# Altium PCB STM_System_Board.PCBDOC (part 2 of 16)
Units mm, origin at the board's own origin, x right, y up, seen from the top; angles counter-clockwise.
Board outline 222.53 x 100.01 mm, 6 copper layers (Top Layer, Int1 (GND), Int2 (Sign), Layer 1, Layer 2, Bottom Layer), stack 1.526 mm thick; 702 components, 774 nets, 3596 pads, 1988 vias.
Unrouted connection lines stored in the file: 1.
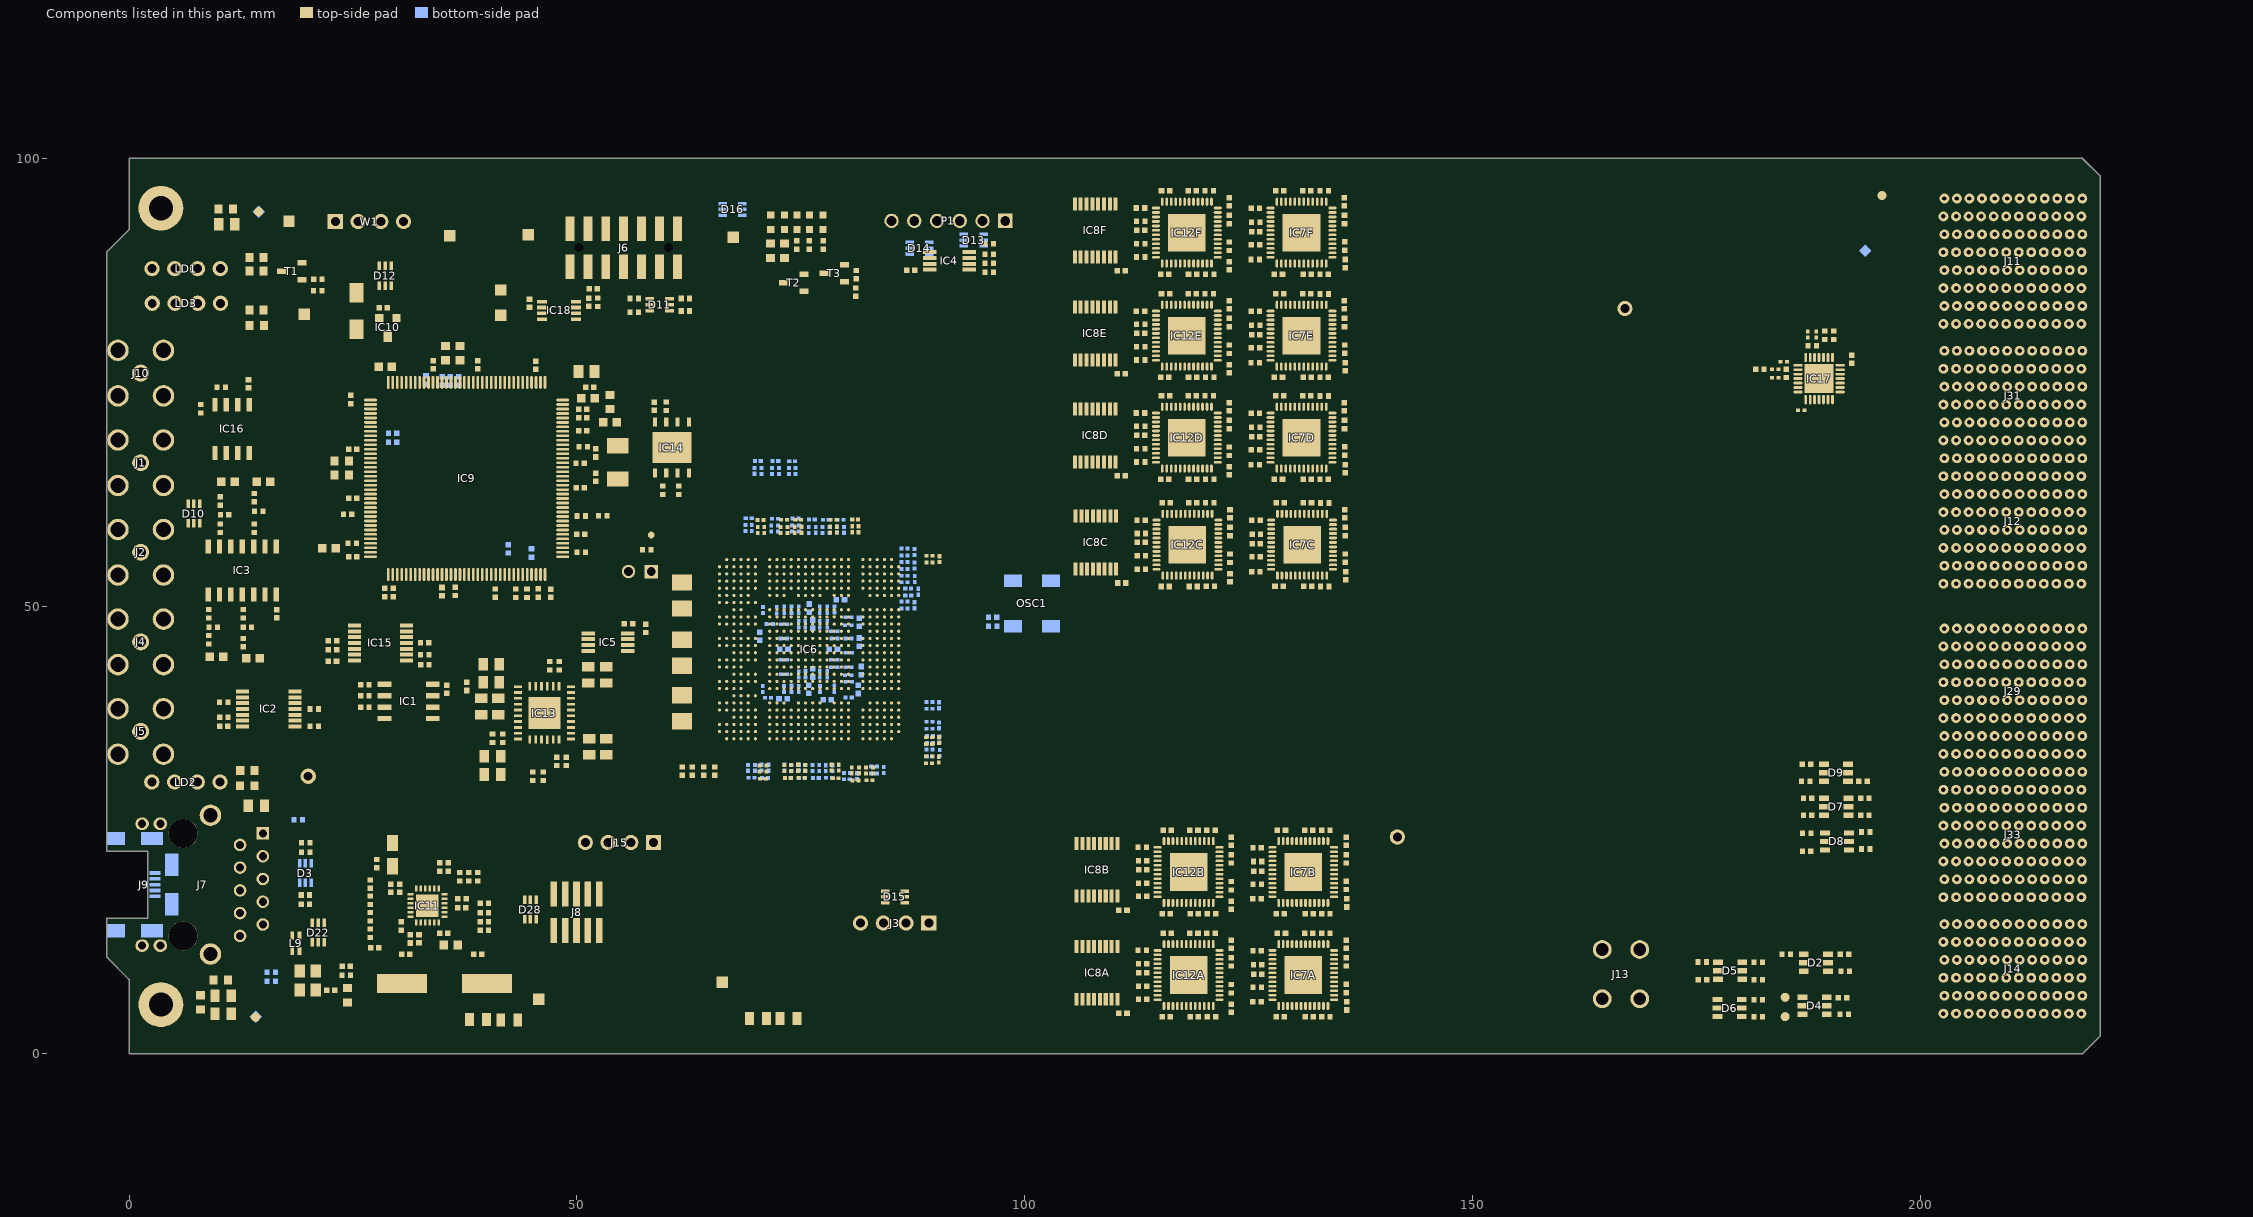
[diagram p6: the components of this part, seen from the top]

## Components (designator, comment, footprint, x,y, rotation, side; value= is the part's Value field where it differs from the comment) (continued)
D1 "SS16" DIOM5127X229N 25.4,82.931 r90 top
D2 "PESD3V3S4UD" SOT95P280X110-6N 188.29,10.191 r0 top
D3 "DRTR5V0U4S-7" SOT65P210X110-6N 19.685,20.195 r90 bottom
D4 "PESD3V3S4UD" SOT95P280X110-6N 188.161,5.368 r0 top
D5 "PESD3V3S4UD" SOT95P280X110-6N 178.734,9.284 r180 top
D6 "PESD3V3S4UD" SOT95P280X110-6N 178.67,5.125 r180 top
D7 "PESD3V3S4UD" SOT95P280X110-6N 190.569,27.58 r180 top
D8 "PESD3V3S4UD" SOT95P280X110-6N 190.648,23.72 r0 top
D9 "PESD3V3S4UD" SOT95P280X110-6N 190.549,31.381 r0 top
D10 "DRTR5V0U4S-7" SOT65P210X110-6N 7.239,60.325 r270 top
D11 "DRTR5V0U4S-7" SOT65P210X110-6N 59.229,83.632 r180 top
D12 "DRTR5V0U4S-7" SOT65P210X110-6N 28.6,86.875 r90 top
D13 "DRTR5V0U4S-7" SOT65P210X110-6N 94.3,90.85 r180 bottom
D14 "DRTR5V0U4S-7" SOT65P210X110-6N 88.225,89.95 r180 bottom
D15 "DRTR5V0U4S-7" SOT65P210X110-6N 85.5,17.525 r0 top
D16 "DRTR5V0U4S-7" SOT65P210X110-6N 67.375,94.275 r180 bottom
D22 "DRTR5V0U4S-7" SOT65P210X110-6N 21.122,13.545 r270 top
D28 "DRTR5V0U4S-7" SOT65P210X110-6N 44.8,16.11 r270 top
FB1 "220R@100MHz" INDC2012X105N 19.939,9.271 r180 top
FB2 "220R@100MHz" INDC2012X105N 19.939,7.112 r180 top
FTG1 "Use only in PCB" FIDUCIAL_TOP_C100-200 14.125,4.1 r90 top
FTG2 "Use only in PCB" FIDUCIAL_TOP_S100-200 14.125,4.175 r90 bottom
FTG3 "Use only in PCB" FIDUCIAL_TOP_S100-200 14.5,94 r90 bottom
FTG4 "Use only in PCB" FIDUCIAL_TOP_S100-200 193.8,89.65 r90 bottom
FTG5 "Use only in PCB" FIDUCIAL_TOP_C100-200 14.475,94.025 r90 top
FTG6 "Use only in PCB" FIDUCIAL_TOP_C100-200 195.675,95.825 r90 top
IC1 "24AA025E48-I/SN" SOIC127P600X175-8N 31.2,39.35 r0 top
IC2 "SN74HCS126PW" SOP65P640X120-14N 15.589,38.506 r180 top
IC3 "SN74HC125D" SOIC127P600X175-14N 12.641,53.966 r270 top
IC4 "LM75AIMM/NOPB" SOP65P490X109-8N 91.567,88.519 r180 top
IC5 "LM75AIMM/NOPB" SOP65P490X109-8N 53.467,45.974 r0 top
IC6 "LFE5U-85F-6BG554C" BGA554C80P26X26_2300X2300X176 75.915,45.184 r270 top locked
IC7A "NB3N401SMNTXG" QFN50P700X700X100-49N-S420 131.075,8.806 r180 top (schematic designator IC7)
IC7B "NB3N401SMNTXG" QFN50P700X700X100-49N-S420 131.075,20.306 r180 top (schematic designator IC7)
IC7C "NB3N401SMNTXG" QFN50P700X700X100-49N-S420 130.944,56.846 r180 top (schematic designator IC7)
IC7D "NB3N401SMNTXG" QFN50P700X700X100-49N-S420 130.879,68.794 r180 top (schematic designator IC7)
IC7E "NB3N401SMNTXG" QFN50P700X700X100-49N-S420 130.879,80.179 r180 top (schematic designator IC7)
IC7F "NB3N401SMNTXG" QFN50P700X700X100-49N-S420 130.879,91.679 r180 top (schematic designator IC7)
IC8A "SN74LV595APWT" SOP65P640X120-16N 108.05,9.056 r270 top (schematic designator IC8)
IC8B "SN74LV595APWT" SOP65P640X120-16N 108.05,20.556 r270 top (schematic designator IC8)
IC8C "SN74LV595APWT" SOP65P640X120-16N 107.919,57.096 r270 top (schematic designator IC8)
IC8D "SN74LV595APWT" SOP65P640X120-16N 107.854,69.044 r270 top (schematic designator IC8)
IC8E "SN74LV595APWT" SOP65P640X120-16N 107.854,80.429 r270 top (schematic designator IC8)
IC8F "SN74LV595APWT" SOP65P640X120-16N 107.854,91.929 r270 top (schematic designator IC8)
IC9 "STM32H743ZIT6" TSQFP50P2200X2200X160-144N 37.685,64.246 r180 top locked
IC10 "STM809SWX6F" SOT-23 29.842,82.143 r180 top
IC11 "LAN8742A-CZ-TR" QFN24_0R5_4X4 33.303,16.561 r90 top
IC12A "NB3N401SMNTXG" QFN50P700X700X100-49N-S420 118.275,8.806 r180 top (schematic designator IC12)
IC12B "NB3N401SMNTXG" QFN50P700X700X100-49N-S420 118.275,20.306 r180 top (schematic designator IC12)
IC12C "NB3N401SMNTXG" QFN50P700X700X100-49N-S420 118.144,56.846 r180 top (schematic designator IC12)
IC12D "NB3N401SMNTXG" QFN50P700X700X100-49N-S420 118.079,68.794 r180 top (schematic designator IC12)
IC12E "NB3N401SMNTXG" QFN50P700X700X100-49N-S420 118.079,80.179 r180 top (schematic designator IC12)
IC12F "NB3N401SMNTXG" QFN50P700X700X100-49N-S420 118.079,91.679 r180 top (schematic designator IC12)
IC13 "MPM54304GMN-0003" MPS_MPM54304GMN 46.372,38.075 r90 top
IC14 "W25Q128JVPIQ" SON127P600X500X80-9N-R345X435 60.602,67.694 r90 top
IC15 "74HC4066PW" SOP65P640X110-14N 28.066,45.876 r180 top
IC16 "LM317LM/NOPB" SOIC127P600X175-8N 11.494,69.765 r270 top
IC17 "CDCLVD1208RHDT" QFN50P500X500X100-29N-S325 188.65,75.389 r270 top
IC18 "PCA9306DCTR" SOP65P400X130-8N 48,83 r0 top
J1 "MCX" AMPHENOL_919-383J-51A 1.3,66 r180 top locked
J2 "MCX" AMPHENOL_919-383J-51A 1.3,56 r180 top locked
J3 "Header 4" SAMTEC_HTSW-104-23-L-S 89.281,14.605 r180 top
J4 "MCX" AMPHENOL_919-383J-51A 1.3,46 r180 top locked
J5 "MCX" AMPHENOL_919-383J-51A 1.3,36 r180 top locked
J6 "Milli-Grid™" MOLEX_87832-1420 55.213,90.007 r180 top
J7 "RJ45" ABRACON_ARJM11C7-114-BA-EW2 6.04,18.895 r270 top locked
J8 "Header 10" SAMTEC_FTSH-105-01-L-DV-K 49.965,15.804 r0 top locked
J9 "Conn_Molex_47491-0001_eec" Molex_47491-0001_0 0.5,18.9 r0 bottom
J10 "MCX" AMPHENOL_919-383J-51A 1.3,76 r180 top locked
J11 "P6" AMPHENOL_10052838-101LF 210.289,88.49 r90 top locked
J12 "P4" AMPHENOL_10052837-101LF 210.289,59.49 r90 top locked
J13 "Mini-Fit Jr.™" MOLEX_39-28-1043 166.54,8.909 r0 top
J14 "P1" AMPHENOL_10052825-101LF 210.289,9.5 r90 top locked
J15 "Header 4" SAMTEC_HTSW-104-23-L-S 58.555,23.6 r180 top
J29 "P3" AMPHENOL_10052837-101LF 210.289,40.49 r90 top locked
J31 "P5" AMPHENOL_10052824-101LF 210.289,73.49 r90 top locked
J33 "P2" AMPHENOL_10052837-101LF 210.289,24.49 r90 top locked
JP2 "1798942 (goldpin 2x 2.54)" jump 58.293,53.848 r270 top
L7 "600R@100MHz" INDC1005X55N 27.66,21.25 r90 top
L9 "90R@100MHz" IND_MURATA_DLW21S 18.63,12.365 r90 top
L15 "600R@100MHz" INDC1005X55N 51.425,74.425 r180 top
LD1 "Red/Green" LED_DIALIGHT_571-0112F 2.565,87.655 r0 top locked
LD2 "Red/Green" LED_DIALIGHT_571-0112F 2.54,30.353 r0 top locked
LD3 "Red/Green" LED_DIALIGHT_571-0112F 2.591,83.795 r0 top locked
LD4 "Green" LED_KINGBRIGHT_KPH-1608CGCK 77.47,92.837 r270 top
LD5 "Green" LED_KINGBRIGHT_KPH-1608CGCK 71.628,92.837 r270 top
LD6 "Green" LED_KINGBRIGHT_KPH-1608CGCK 74.549,92.837 r270 top
LD7 "Green" LED_KINGBRIGHT_KPH-1608CGCK 75.946,92.837 r270 top
LD8 "Green" LED_KINGBRIGHT_KPH-1608CGCK 73.152,92.837 r270 top
OSC1 "100MHz" OSC_ECS_ECS-3953M 100.793,50.302 r180 bottom
P1 "61300611121" 61300611121 91.465,92.992 r180 top
Q1 "8MHz" XTAL_TXC_7A 54.534,66.04 r270 top
Q2 "25MHz" XTAL_ABRACON_ABLS 35.203,7.865 r180 top
R1 "2k2" RESC1005X40N 50.484,60.05 r180 top
R2 "2k2" RESC1005X40N 52.883,60.071 r0 top
R3 "0" RESC1608X55N 10.795,94.336 r180 top
R4 "0" RESC1608X55N 8,5.75 r270 top
R5 "51" RESC1005X40N 61.758,31.574 r90 top
R6 "51" RESC1005X40N 62.862,31.574 r90 top
R7 "51" RESC1005X40N 65.358,31.574 r90 top
R8 "51" RESC1005X40N 10.16,58.674 r270 top
R9 "51" RESC1005X40N 10.16,61.722 r270 top
R10 "10k" RESC1005X40N 10.668,60.198 r0 top
R11 "10k" RESC1005X40N 20.669,36.601 r180 top
R12 "10k" RESC1005X40N 42.351,56.376 r90 bottom
R13 "10k" RESC1005X40N 50.69,67.766 r180 top
R14 "0" RESC1005X40N 21.082,86.487 r180 top
R15 "51" RESC1005X40N 13.97,58.674 r270 top
R16 "10k" RESC1005X40N 24.924,56.996 r0 top
R17 "51" RESC1005X40N 64.158,31.574 r90 top
R18 "10k" RESC1005X40N 20.669,38.506 r180 top
R19 "51" RESC1005X40N 13.97,62.103 r270 top
R20 "10k" RESC1005X40N 14.478,60.579 r0 top
R21 "10k" RESC1005X40N 10.574,39.268 r0 top
R22 "165" RESC0603X28N 81.483,31.66 r270 top
R23 "140" RESC0603X28N 81.103,30.514 r0 top
R24 "165" RESC0603X28N 81.415,58.57 r90 top
R25 "140" RESC0603X28N 81.06,59.662 r0 top
R26 "165" RESC0603X28N 80.67,31.66 r270 top
R27 "165" RESC0603X28N 80.729,58.57 r90 top
R28 "165" RESC0603X28N 89.366,33.986 r0 bottom
R29 "140" RESC0603X28N 90.49,33.587 r90 bottom
R30 "10k" RESC1005X40N 28.551,51.505 r90 top
R31 "10k" RESC1005X40N 40.881,51.442 r90 top
R32 "165" RESC0603X28N 79.812,58.507 r90 bottom
R33 "10k" RESC1005X40N 29.479,51.505 r90 top
R34 "140" RESC0603X28N 79.429,59.623 r0 bottom
R35 "10k" RESC1005X40N 44.424,51.419 r270 top
R36 "49R9" RESC1005X40N 26.909,17.161 r270 top
R37 "49R9" RESC1005X40N 26.909,18.956 r90 top
R38 "165" RESC0603X28N 89.371,33.216 r0 bottom
R39 "330" RESC1005X40N 15.875,9.144 r180 bottom
R40 "49R9" RESC1005X40N 26.909,15.311 r270 top
R41 "49R9" RESC1005X40N 26.909,13.472 r90 top
R42 "10k" RESC1005X40N 39.669,15.781 r180 top
R43 "10k" RESC1005X40N 39.669,14.754 r180 top
R44 "10k" RESC1005X40N 37.909,19.774 r270 top
R45 "33" RESC1005X40N 39.669,16.811 r180 top
R46 "33" RESC1005X40N 39.669,13.814 r180 top
R47 "10k" RESC1005X40N 37.162,17.314 r0 top
R48 "165" RESC0603X28N 79.03,58.518 r90 bottom
R49 "12k1" RESC1005X40N 30.384,14.284 r270 top
R50 "33" RESC1005X40N 38.909,19.774 r270 top
R51 "165" RESC0603X28N 79.21,31.954 r270 top
R52 "140" RESC0603X28N 78.882,30.771 r0 top
R53 "165" RESC0603X28N 78.998,58.518 r90 top
R54 "140" RESC0603X28N 78.625,59.622 r0 top
R55 "10k" RESC1005X40N 15.875,8.128 r180 bottom
R56 "165" RESC0603X28N 78.423,31.954 r270 top
R57 "165" RESC0603X28N 78.262,58.518 r90 top
R58 "220" RESC1608X55N 13.211,31.625 r0 top
R59 "10k" RESC1005X40N 10.586,37.577 r0 top
R60 "33" RESC1005X40N 34.695,20.865 r270 top
R61 "165" RESC0603X28N 80.122,30.653 r0 bottom
R62 "140" RESC0603X28N 81.265,31.009 r270 bottom
R63 "165" RESC0603X28N 73.655,65.059 r90 bottom
R64 "140" RESC0603X28N 74.025,66.152 r180 bottom
R65 "165" RESC0603X28N 80.148,31.364 r0 bottom
R66 "165" RESC0603X28N 74.404,65.058 r90 bottom
R67 "165" RESC0603X28N 76.289,31.932 r270 bottom
R68 "140" RESC0603X28N 76.661,30.803 r180 bottom
R69 "165" RESC0603X28N 75.864,58.5 r90 bottom
R70 "140" RESC0603X28N 76.211,59.647 r180 bottom
R71 "165" RESC0603X28N 77.056,31.932 r270 bottom
R72 "165" RESC0603X28N 76.647,58.505 r90 bottom
R73 "24k" RESC1608X55N 24.384,6.55 r270 top
R74 "165" RESC0603X28N 73.153,31.952 r270 bottom
R75 "10k" RESC1005X40N 24.257,8.763 r0 top
R76 "220" RESC1608X55N 13.192,29.94 r0 top
R77 "220" RESC1608X55N 14.267,81.295 r0 top
R78 "220" RESC1608X55N 14.224,83.058 r0 top
R79 "140" RESC0603X28N 73.55,30.795 r180 bottom
R80 "165" RESC0603X28N 74.777,58.666 r90 bottom
R81 "140" RESC0603X28N 74.396,59.759 r0 bottom
R82 "165" RESC0603X28N 73.94,31.927 r270 bottom
R83 "165" RESC0603X28N 74.015,58.667 r90 bottom
R84 "165" RESC0603X28N 70.596,31.955 r270 bottom
R85 "140" RESC0603X28N 70.978,30.817 r180 bottom
R86 "165" RESC0603X28N 71.679,58.669 r90 bottom
R87 "140" RESC0603X28N 72.11,59.736 r180 bottom
R88 "165" RESC0603X28N 71.389,31.949 r270 bottom
R89 "165" RESC0603X28N 72.441,58.669 r90 bottom
R90 "165" RESC0603X28N 69.861,31.939 r270 bottom
R91 "140" RESC0603X28N 69.497,30.841 r0 bottom
R92 "51" RESC1005X40N 8.89,49.149 r90 top
R93 "51" RESC1005X40N 8.89,46.228 r90 top
R94 "165" RESC0603X28N 69.518,58.696 r90 bottom
R95 "30" RESC1608X55N 53.7,72.775 r270 top
R96 "10k" RESC1005X40N 43.174,51.419 r270 top
R97 "0" RESC1005X40N 45.681,51.449 r270 top
R98 "1k5" RESC1005X40N 36.909,19.774 r270 top
R99 "10k" RESC1005X40N 35.647,20.865 r270 top
R100 "140" RESC0603X28N 69.175,59.802 r0 bottom
R101 "165" RESC0603X28N 69.099,31.939 r270 bottom
R102 "165" RESC0603X28N 68.801,58.696 r90 bottom
R103 "165" RESC0603X28N 74.778,31.952 r270 bottom
R104 "140" RESC0603X28N 75.108,30.795 r180 bottom
R105 "165" RESC0603X28N 69.828,65.089 r90 bottom
R106 "140" RESC0603X28N 70.189,66.192 r180 bottom
R107 "165" RESC0603X28N 75.514,31.927 r270 bottom
R108 "165" RESC0603X28N 70.59,65.086 r90 bottom
R109 "165" RESC0603X28N 74.678,31.947 r270 top
R110 "140" RESC0603X28N 75.066,30.819 r180 top
R111 "165" RESC0603X28N 74.321,58.514 r90 top
R112 "140" RESC0603X28N 74.695,59.638 r180 top
R113 "165" RESC0603X28N 75.443,31.94 r270 top
R114 "165" RESC0603X28N 75.071,58.514 r90 top
R115 "165" RESC0603X28N 73.146,31.929 r270 top
R116 "140" RESC0603X28N 73.531,30.815 r180 top
R117 "165" RESC0603X28N 72.715,58.5 r90 top
R118 "140" RESC0603X28N 73.115,59.621 r180 top
R119 "165" RESC0603X28N 73.897,31.932 r270 top
R120 "165" RESC0603X28N 73.515,58.5 r90 top
R121 "165" RESC0603X28N 71.149,31.862 r270 top
R122 "140" RESC0603X28N 70.743,30.719 r0 top
R123 "165" RESC0603X28N 70.91,58.476 r90 top
R124 "140" RESC0603X28N 70.503,59.594 r0 top
R125 "22" RESC1005X40N 191.49,11.141 r0 top
R126 "22" RESC1005X40N 191.45,4.418 r0 top
R127 "22" RESC1005X40N 191.261,6.268 r0 top
R128 "49R9" RESC1005X40N 50.35,65.925 r180 top
R129 "165" RESC0603X28N 70.387,31.862 r270 top
R130 "165" RESC0603X28N 70.173,58.476 r90 top
R131 "2k2" RESC1005X40N 29.424,69.288 r180 bottom
R132 "2k2" RESC1005X40N 29.424,68.288 r180 bottom
R133 "165" RESC0603X28N 86.569,49.725 r0 bottom
R134 "140" RESC0603X28N 87.687,50.086 r270 bottom
R135 "0" RESC1608X55N 10.25,8.25 r180 top
R136 "10k" RESC1005X40N 44.924,55.919 r270 bottom
R137 "22" RESC1005X40N 191.577,9.241 r0 top
R138 "22" RESC1005X40N 184.988,11.141 r180 top
R139 "22" RESC1005X40N 181.873,6.075 r0 top
R140 "22" RESC1005X40N 175.634,8.284 r180 top
R141 "22" RESC1005X40N 181.873,4.168 r0 top
R142 "22" RESC1005X40N 181.873,10.234 r0 top
R143 "22" RESC1005X40N 181.873,8.284 r0 top
R144 "165" RESC0603X28N 86.571,50.491 r0 bottom
R145 "165" RESC0603X28N 89.357,55.603 r0 top
R146 "140" RESC0603X28N 90.475,55.227 r90 top
R147 "165" RESC0603X28N 89.357,54.866 r0 top
R148 "165" RESC0603X28N 86.974,51.959 r0 bottom
R149 "140" RESC0603X28N 88.102,51.595 r90 bottom
R150 "165" RESC0603X28N 86.978,51.186 r0 bottom
R151 "165" RESC0603X28N 86.569,52.656 r0 bottom
R152 "140" RESC0603X28N 87.705,53.027 r270 bottom
R153 "165" RESC0603X28N 86.573,53.393 r0 bottom
R154 "165" RESC0603X28N 86.559,54.134 r0 bottom
R155 "140" RESC0603X28N 87.67,54.513 r270 bottom
R156 "165" RESC0603X28N 86.558,54.913 r0 bottom
R157 "165" RESC0603X28N 86.559,56.419 r0 bottom
R158 "140" RESC0603X28N 87.667,56.018 r90 bottom
R159 "165" RESC0603X28N 86.562,55.638 r0 bottom
R160 "165" RESC0603X28N 78.189,58.498 r90 bottom
R161 "140" RESC0603X28N 77.776,59.64 r0 bottom
R162 "165" RESC0603X28N 77.419,58.498 r90 bottom
R163 "165" RESC0603X28N 72.542,65.064 r90 bottom
R164 "140" RESC0603X28N 72.145,66.177 r0 bottom
R165 "165" RESC0603X28N 71.767,65.059 r90 bottom
R166A "100" RESC1005X40N 133.599,4.141 r0 top (schematic designator R166)
R166B "100" RESC1005X40N 133.599,15.641 r0 top (schematic designator R166)
R166C "100" RESC1005X40N 133.468,52.181 r0 top (schematic designator R166)
R166D "100" RESC1005X40N 133.403,64.129 r0 top (schematic designator R166)
R166E "100" RESC1005X40N 133.403,75.514 r0 top (schematic designator R166)
R166F "100" RESC1005X40N 133.403,87.014 r0 top (schematic designator R166)
R167A "49R9" RESC1005X40N 125.915,5.806 r0 top (schematic designator R167)
R167B "49R9" RESC1005X40N 125.915,17.306 r0 top (schematic designator R167)
R167C "49R9" RESC1005X40N 125.784,53.846 r0 top (schematic designator R167)
R167D "49R9" RESC1005X40N 125.719,65.794 r0 top (schematic designator R167)
R167E "49R9" RESC1005X40N 125.719,77.179 r0 top (schematic designator R167)
R167F "49R9" RESC1005X40N 125.719,88.679 r0 top (schematic designator R167)
R168A "100" RESC1005X40N 135.877,7.311 r90 top (schematic designator R168)
R168B "100" RESC1005X40N 135.877,18.811 r90 top (schematic designator R168)
R168C "100" RESC1005X40N 135.746,55.351 r90 top (schematic designator R168)
R168D "100" RESC1005X40N 135.681,67.299 r90 top (schematic designator R168)
R168E "100" RESC1005X40N 135.681,78.684 r90 top (schematic designator R168)
R168F "100" RESC1005X40N 135.681,90.184 r90 top (schematic designator R168)
R169A "49R9" RESC1005X40N 125.94,7.455 r0 top (schematic designator R169)
R169B "49R9" RESC1005X40N 125.94,18.955 r0 top (schematic designator R169)
R169C "49R9" RESC1005X40N 125.809,55.495 r0 top (schematic designator R169)
R169D "49R9" RESC1005X40N 125.744,67.443 r0 top (schematic designator R169)
R169E "49R9" RESC1005X40N 125.744,78.828 r0 top (schematic designator R169)
R169F "49R9" RESC1005X40N 125.744,90.328 r0 top (schematic designator R169)
R170A "100" RESC1005X40N 135.872,10.274 r90 top (schematic designator R170)
R170B "100" RESC1005X40N 135.872,21.774 r90 top (schematic designator R170)
R170C "100" RESC1005X40N 135.741,58.314 r90 top (schematic designator R170)
R170D "100" RESC1005X40N 135.676,70.262 r90 top (schematic designator R170)
R170E "100" RESC1005X40N 135.676,81.647 r90 top (schematic designator R170)
R170F "100" RESC1005X40N 135.676,93.147 r90 top (schematic designator R170)
R171A "49R9" RESC1005X40N 125.975,9.981 r0 top (schematic designator R171)
R171B "49R9" RESC1005X40N 125.975,21.481 r0 top (schematic designator R171)
R171C "49R9" RESC1005X40N 125.844,58.021 r0 top (schematic designator R171)
R171D "49R9" RESC1005X40N 125.779,69.969 r0 top (schematic designator R171)
R171E "49R9" RESC1005X40N 125.779,81.354 r0 top (schematic designator R171)
R171F "49R9" RESC1005X40N 125.779,92.854 r0 top (schematic designator R171)
R172A "100" RESC1005X40N 133.601,13.459 r180 top (schematic designator R172)
R172B "100" RESC1005X40N 133.601,24.959 r180 top (schematic designator R172)
R172C "100" RESC1005X40N 133.47,61.499 r180 top (schematic designator R172)
R172D "100" RESC1005X40N 133.405,73.447 r180 top (schematic designator R172)
R172E "100" RESC1005X40N 133.405,84.832 r180 top (schematic designator R172)
R172F "100" RESC1005X40N 133.405,96.332 r180 top (schematic designator R172)
R173A "49R9" RESC1005X40N 125.925,11.531 r0 top (schematic designator R173)
R173B "49R9" RESC1005X40N 125.925,23.031 r0 top (schematic designator R173)
R173C "49R9" RESC1005X40N 125.794,59.571 r0 top (schematic designator R173)
R173D "49R9" RESC1005X40N 125.729,71.519 r0 top (schematic designator R173)
R173E "49R9" RESC1005X40N 125.729,82.904 r0 top (schematic designator R173)
R173F "49R9" RESC1005X40N 125.729,94.404 r0 top (schematic designator R173)
R174A "100" RESC1005X40N 120.835,4.145 r0 top (schematic designator R174)
R174B "100" RESC1005X40N 120.835,15.645 r0 top (schematic designator R174)
R174C "100" RESC1005X40N 120.704,52.185 r0 top (schematic designator R174)
R174D "100" RESC1005X40N 120.639,64.133 r0 top (schematic designator R174)
R174E "100" RESC1005X40N 120.639,75.518 r0 top (schematic designator R174)
R174F "100" RESC1005X40N 120.639,87.018 r0 top (schematic designator R174)
R175A "49R9" RESC1005X40N 113.14,6.09 r0 top (schematic designator R175)
R175B "49R9" RESC1005X40N 113.14,17.59 r0 top (schematic designator R175)
R175C "49R9" RESC1005X40N 113.009,54.129 r0 top (schematic designator R175)
R175D "49R9" RESC1005X40N 112.944,66.078 r0 top (schematic designator R175)
R175E "49R9" RESC1005X40N 112.944,77.463 r0 top (schematic designator R175)
R175F "49R9" RESC1005X40N 112.944,88.963 r0 top (schematic designator R175)
R176 "49R9" RESC1005X40N 24.4,60.25 r0 top
R177 "49R9" RESC1005X40N 33.025,43.425 r0 top
R178A "100" RESC1005X40N 123.028,7.286 r90 top (schematic designator R178)
R178B "100" RESC1005X40N 123.028,18.786 r90 top (schematic designator R178)
R178C "100" RESC1005X40N 122.897,55.326 r90 top (schematic designator R178)
R178D "100" RESC1005X40N 122.832,67.274 r90 top (schematic designator R178)
R178E "100" RESC1005X40N 122.832,78.659 r90 top (schematic designator R178)
R178F "100" RESC1005X40N 122.832,90.159 r90 top (schematic designator R178)
R179 "49R9" RESC1005X40N 22.709,46.13 r180 top
R180 "1k" RESC1608X55N 36.935,78.232 r90 top
R181 "1k" RESC1608X55N 35.306,78.232 r90 top
R182 "1k" RESC1608X55N 23.749,66.167 r180 top
R183 "1k" RESC1608X55N 23.749,64.643 r180 top
R184A "49R9" RESC1005X40N 113.14,7.556 r0 top (schematic designator R184)
R184B "49R9" RESC1005X40N 113.14,19.056 r0 top (schematic designator R184)
R184C "49R9" RESC1005X40N 113.009,55.596 r0 top (schematic designator R184)
R184D "49R9" RESC1005X40N 112.944,67.544 r0 top (schematic designator R184)
R184E "49R9" RESC1005X40N 112.944,78.929 r0 top (schematic designator R184)
R184F "49R9" RESC1005X40N 112.944,90.429 r0 top (schematic designator R184)
R185 "49R9" RESC1005X40N 36.435,51.629 r90 top
R186 "49R9" RESC1005X40N 36.825,75.125 r90 bottom
R187 "49R9" RESC1005X40N 35.875,75.125 r90 bottom
R188 "49R9" RESC1005X40N 34.95,75.125 r90 bottom
R189 "49R9" RESC1005X40N 33.15,75.225 r90 bottom
R190A "100" RESC1005X40N 123.028,10.274 r90 top (schematic designator R190)
R190B "100" RESC1005X40N 123.028,21.774 r90 top (schematic designator R190)
R190C "100" RESC1005X40N 122.897,58.314 r90 top (schematic designator R190)
R190D "100" RESC1005X40N 122.832,70.262 r90 top (schematic designator R190)
R190E "100" RESC1005X40N 122.832,81.647 r90 top (schematic designator R190)
R190F "100" RESC1005X40N 122.832,93.147 r90 top (schematic designator R190)
R191A "49R9" RESC1005X40N 113.14,10.056 r0 top (schematic designator R191)
R191B "49R9" RESC1005X40N 113.14,21.556 r0 top (schematic designator R191)
R191C "49R9" RESC1005X40N 113.009,58.096 r0 top (schematic designator R191)
R191D "49R9" RESC1005X40N 112.944,70.044 r0 top (schematic designator R191)
R191E "49R9" RESC1005X40N 112.944,81.429 r0 top (schematic designator R191)
R191F "49R9" RESC1005X40N 112.944,92.929 r0 top (schematic designator R191)
R192A "100" RESC1005X40N 120.778,13.481 r180 top (schematic designator R192)
R192B "100" RESC1005X40N 120.778,24.981 r180 top (schematic designator R192)
R192C "100" RESC1005X40N 120.647,61.521 r180 top (schematic designator R192)
R192D "100" RESC1005X40N 120.582,73.469 r180 top (schematic designator R192)
R192E "100" RESC1005X40N 120.582,84.854 r180 top (schematic designator R192)
R192F "100" RESC1005X40N 120.582,96.354 r180 top (schematic designator R192)
R193A "49R9" RESC1005X40N 113.1,11.556 r0 top (schematic designator R193)
R193B "49R9" RESC1005X40N 113.1,23.056 r0 top (schematic designator R193)
R193C "49R9" RESC1005X40N 112.969,59.596 r0 top (schematic designator R193)
R193D "49R9" RESC1005X40N 112.904,71.544 r0 top (schematic designator R193)
R193E "49R9" RESC1005X40N 112.904,82.929 r0 top (schematic designator R193)
R193F "49R9" RESC1005X40N 112.904,94.429 r0 top (schematic designator R193)
R194 "10k" RESC1005X40N 21.067,85.21 r0 top
R195 "10k" RESC1005X40N 77.47,90.297 r270 top
R196 "1k" RESC1608X55N 71.628,89.662 r90 top
R197 "49R9" RESC1005X40N 32.996,45.876 r0 top
R198 "10k" RESC1005X40N 50.482,56.002 r180 top
R199 "10" RESC1005X40N 19.717,22.531 r180 top
R200 "10k" RESC1005X40N 9.398,47.625 r0 top
R201 "51" RESC1005X40N 12.754,49.149 r90 top
R202 "51" RESC1005X40N 12.754,45.914 r90 top
R203 "10k" RESC1005X40N 13.208,47.625 r0 top
R204 "22" RESC1005X40N 175.616,10.262 r180 top
R205 "22" RESC1005X40N 96.415,47.747 r180 bottom
R206 "1k2" RESC1608X55N 14.224,88.9 r180 top
R207 "10k" RESC1005X40N 74.549,90.297 r270 top
R208 "10k" RESC1005X40N 75.946,90.297 r270 top
R209 "1k2" RESC1608X55N 14.224,87.376 r0 top
R210 "0" RESC1005X40N 45.085,30.988 r270 top
R211 "0" RESC1005X40N 46.228,30.988 r270 top
R212 "330" RESC1005X40N 18.894,26.162 r180 bottom
R213 "10k" RESC1005X40N 81.131,85.04 r270 top
R214 "10k" RESC1005X40N 81.153,86.995 r270 top
R215 "10k" RESC1005X40N 96.012,87.249 r0 top
R216 "10k" RESC1005X40N 96.012,88.265 r0 top
R217 "10k" RESC1005X40N 96.012,90.424 r0 top
R218 "0" RESC1005X40N 96.012,89.281 r0 top
R219 "0" RESC1005X40N 57.658,47.498 r270 top
R220 "10" RESC1005X40N 19.717,23.556 r180 top
R221 "10" RESC1005X40N 19.685,16.691 r180 top
R222 "10" RESC1005X40N 19.685,17.744 r180 top
R223 "4k7" RESC1005X40N 59.586,62.924 r270 top
R224 "4k7" RESC1005X40N 59.967,72.292 r90 top
R225 "4k7" RESC1005X40N 61.364,62.924 r270 top
R226 "1k" RESC1005X40N 33.019,44.554 r0 top
R227 "4k7" RESC1005X40N 56.388,82.804 r180 top
R228 "10k" RESC1005X40N 22.709,45.114 r180 top
R229 "4k7" RESC1005X40N 57.785,56.276 r180 top
R230 "1k5" RESC1005X40N 41.716,35.23 r270 top
R231 "1k8" RESC1005X40N 40.573,35.23 r270 top
R232 "5k1" RESC1005X40N 48.012,43.334 r90 top
R233 "1k6" RESC1005X40N 46.946,43.328 r90 top
R234 "6k8" RESC1005X40N 48.808,32.657 r270 top
R235 "1k5" RESC1005X40N 47.732,32.657 r270 top
R236 "1k" RESC1608X55N 73.152,89.662 r90 top
R237 "470" RESC1005X40N 10.287,74.422 r0 top
R238 "820" RESC1005X40N 7.994,72.015 r90 top
R239 "4k7" RESC1005X40N 62.103,82.931 r180 top
R240 "4k7" RESC1005X40N 62.103,84.328 r180 top
R241 "4k7" RESC1005X40N 56.388,84.328 r180 top
R242 "330" RESC1005X40N 182.05,76.439 r180 top
R243 "1k5" RESC1005X40N 189.3,80.214 r270 top
R244 "4k7" RESC1005X40N 190.275,80.214 r270 top
R245 "49R9" RESC1005X40N 187.882,79.052 r0 top
R246 "1k5" RESC1005X40N 185,75.964 r90 top
R247 "165" RESC0603X28N 89.348,39.301 r0 bottom
R248 "140" RESC0603X28N 90.425,38.925 r90 bottom
R249 "165" RESC0603X28N 89.348,38.529 r0 bottom
R250 "165" RESC0603X28N 89.323,34.593 r0 top
R251 "140" RESC0603X28N 90.4,35.025 r270 top
R252 "165" RESC0603X28N 89.323,35.365 r0 top
R253 "165" RESC0603X28N 89.298,33.233 r0 top
R254 "140" RESC0603X28N 90.375,32.843 r90 top
R255 "165" RESC0603X28N 89.298,32.461 r0 top
R256 "165" RESC0603X28N 89.348,37.07 r0 bottom
R257 "140" RESC0603X28N 90.425,36.686 r90 bottom
R258 "165" RESC0603X28N 89.348,36.299 r0 bottom
R259 "165" RESC0603X28N 82.273,31.627 r270 top
R260 "140" RESC0603X28N 82.661,30.55 r180 top
R261 "165" RESC0603X28N 83.045,31.627 r270 top
R262 "22" RESC1005X40N 187.274,24.638 r180 top
R263 "22" RESC1005X40N 187.26,22.619 r180 top
R264 "22" RESC1005X40N 187.249,32.331 r180 top
R265 "22" RESC1005X40N 187.153,30.431 r180 top
R266 "22" RESC1005X40N 193.855,22.876 r0 top
R267 "22" RESC1005X40N 193.855,24.776 r0 top
R268 "22" RESC1005X40N 193.769,26.63 r0 top
R269 "22" RESC1005X40N 193.769,28.53 r0 top
R270 "22" RESC1005X40N 187.369,28.53 r180 top
R271 "22" RESC1005X40N 193.549,30.431 r0 top
R272 "22" RESC1005X40N 187.369,26.63 r180 top
R273 "165" RESC0603X28N 89.398,34.712 r0 bottom
R274 "140" RESC0603X28N 90.475,35.093 r270 bottom
R275 "165" RESC0603X28N 89.398,35.484 r0 bottom
R276 "165" RESC0603X28N 83.175,32.09 r0 bottom
R277 "140" RESC0603X28N 84.25,31.696 r90 bottom
R278 "165" RESC0603X28N 83.173,31.318 r0 bottom
R279 "165" RESC0603X28N 78.547,31.9 r270 bottom
R280 "140" RESC0603X28N 78.15,30.825 r0 bottom
R281 "165" RESC0603X28N 77.775,31.9 r270 bottom
R282 "200k" RESC1005X40N 52.3,83.9 r90 top
R283 "0" RESC1005X40N 96.4,48.725 r0 bottom
R284 "0" RESC1005X40N 26.325,38.7 r0 top
R285 "0" RESC1005X40N 26.325,39.962 r0 top
R286 "0" RESC1005X40N 26.325,41.225 r0 top
R287 "4M7" RESC2113X55N 70.208,3.959 r0 top
R288 "4M7" RESC2113X55N 73.6,3.95 r0 top
R289 "4M7" RESC2113X55N 42.442,3.817 r180 top
R290 "4M7" RESC2113X55N 38.975,3.825 r180 top
R300 "4k7" RESC1005X40N 24.765,73.05 r90 top
ST2 "SCHROFF_PANEL_3HP_4U - STM_sys_Board" "SCHROFF_PANEL_3HP_4U - STM_sys_Board" 3.556,5.512 r0 top locked
T1 "BSH103" SOT95P230X110-3N 18.161,87.376 r180 top
T2 "BSH103" SOT95P230X110-3N 74.175,86.106 r180 top
T3 "BSH103" SOT95P230X110-3N 78.73,87.158 r180 top
TP1 "Test Point" TPS127 41.475,85.275 r0 top
TP2 "Test Point" TPS127 41.48,82.477 r0 top
TP3 "Test Point" TPS127 45.72,6.096 r0 top
TP4 "Test Point" TPS127 66.215,7.997 r90 top
TP5 "Test Point" TPS127 17.856,92.939 r0 top
TP6 "Test Point" TPS127 67.437,91.186 r180 top
TP7 "Test Point" TPS127 44.577,91.44 r0 top
TP8 "Test Point" TPS127 19.558,82.55 r0 top
TP9 "Test Point" TPS127 35.814,91.313 r0 top
W1 "Header 4" SAMTEC_HTSW-104-23-L-S 23.028,92.917 r0 top

## Footprints (in the part's own frame and the unit in brackets; to place one, negate y for a bottom-side part, rotate by r counter-clockwise, add the part's x,y. Pads: shape width x height; smd on the part's side, far side on the other; paste and mask are expansions set on the pad)
61300611121 [mm] "Pin Header, pitch 2.54 mm, THT, Vertical, single row, 6p"
  rect 1.6x1.6 hole 1.1: 1(-6.35,0)
  round 1.6 hole 1.1: 2(-3.81,0) 3(-1.27,0) 4(1.27,0) 5(3.81,0) 6(6.35,0)
  silkscreen extent -7.77,-1.35 7.77,1.35, body extent -7.62,-1.27 7.62,1.27, height 8.57
ABRACON_ARJM11C7-114-BA-EW2 [mm] "LAN Transformer, body 21.84x15.88mm"
  round 1.4 hole 0.9: 1(5.715,6.35) 2(4.445,8.89) 3(3.175,6.35) 4(1.905,8.89) 5(0.635,6.35) 6(-0.635,8.89) 7(-1.905,6.35) 8(-3.175,8.89) 9(-4.445,6.35)
  rect 1.4x1.4 hole 0.9: 10(-5.715,8.89)
  oval 1.4x1.52 hole 0.9: L1(-6.8,-2.55) L2(-6.8,-4.58) L3(6.8,-2.55) L4(6.8,-4.58)
  round 3.25 hole 3.25 unplated: MH1(-5.715,0) MH2(5.715,0)
  round 2.4 hole 1.6: S1(-7.745,3.05) S2(7.745,3.05)
  silkscreen extent -8,-10.87 8.04,10.63, body extent -10.33,-10.87 10.33,10.63, height 16.15
AMPHENOL_919-383J-51A [mm] "50 Ohm, RF Connector, MCX Right Angle PCB Receptacle Jack"
  round 1.9 hole 1.2: 1(0,0)
  round 2.4 hole 1.7: 2(-2.54,2.54) 2(-2.54,-2.54) 2(2.54,2.54) 2(2.54,-2.54)
  silkscreen extent -3,-3 6.5,3, body extent -3,-3 6.5,3, height 6
AMPHENOL_10052824-101LF [mm] "72 Contacts, 2mm Pitch, 6 Columns, 4 Pairs per Column, 2 Walls, Right Angle Header"
  round 1.1 hole 0.5: A1(-5,-7.65) A2(-3,-7.75) A3(-1,-7.65) A4(1,-7.75) A5(3,-7.65) A6(5,-7.75) B1(-5,-6.25) B2(-3,-6.35) B3(-1,-6.25) B4(1,-6.35) B5(3,-6.25) B6(5,-6.35) C1(-5,-4.85) C2(-3,-4.95) C3(-1,-4.85) C4(1,-4.95) C5(3,-4.85) C6(5,-4.95) D1(-5,-3.45) D2(-3,-3.55) D3(-1,-3.45) D4(1,-3.55) D5(3,-3.45) D6(5,-3.55) E1(-5,-2.05) E2(-3,-2.15) E3(-1,-2.05) E4(1,-2.15) E5(3,-2.05) E6(5,-2.15) F1(-5,-0.65) F2(-3,-0.75) F3(-1,-0.65) F4(1,-0.75) F5(3,-0.65) F6(5,-0.75) G1(-5,0.75) G2(-3,0.65) G3(-1,0.75) G4(1,0.65) G5(3,0.75) G6(5,0.65) H1(-5,2.15) H2(-3,2.05) H3(-1,2.15) H4(1,2.05) H5(3,2.15) H6(5,2.05) I1(-5,3.55) I2(-3,3.45) I3(-1,3.55) I4(1,3.45) I5(3,3.55) I6(5,3.45) J1(-5,4.95) J2(-3,4.85) J3(-1,4.95) J4(1,4.85) J5(3,4.95) J6(5,4.85) K1(-5,6.35) K2(-3,6.25) K3(-1,6.35) K4(1,6.25) K5(3,6.35) K6(5,6.25) L1(-5,7.75) L2(-3,7.65) L3(-1,7.75) L4(1,7.65) L5(3,7.75) L6(5,7.65)
  silkscreen extent -5.95,-21.95 5.95,11.85, body extent -5.95,-21.95 5.95,11.85, height 15.25
AMPHENOL_10052825-101LF [mm] "72 Contacts, 2mm Pitch, 6 Columns, 4 Pairs per Column, 4 Walls, Right Angle Header"
  round 1.1 hole 0.5: A1(-5,-7.65) A2(-3,-7.75) A3(-1,-7.65) A4(1,-7.75) A5(3,-7.65) A6(5,-7.75) B1(-5,-6.25) B2(-3,-6.35) B3(-1,-6.25) B4(1,-6.35) B5(3,-6.25) B6(5,-6.35) C1(-5,-4.85) C2(-3,-4.95) C3(-1,-4.85) C4(1,-4.95) C5(3,-4.85) C6(5,-4.95) D1(-5,-3.45) D2(-3,-3.55) D3(-1,-3.45) D4(1,-3.55) D5(3,-3.45) D6(5,-3.55) E1(-5,-2.05) E2(-3,-2.15) E3(-1,-2.05) E4(1,-2.15) E5(3,-2.05) E6(5,-2.15) F1(-5,-0.65) F2(-3,-0.75) F3(-1,-0.65) F4(1,-0.75) F5(3,-0.65) F6(5,-0.75) G1(-5,0.75) G2(-3,0.65) G3(-1,0.75) G4(1,0.65) G5(3,0.75) G6(5,0.65) H1(-5,2.15) H2(-3,2.05) H3(-1,2.15) H4(1,2.05) H5(3,2.15) H6(5,2.05) I1(-5,3.55) I2(-3,3.45) I3(-1,3.55) I4(1,3.45) I5(3,3.55) I6(5,3.45) J1(-5,4.95) J2(-3,4.85) J3(-1,4.95) J4(1,4.85) J5(3,4.95) J6(5,4.85) K1(-5,6.35) K2(-3,6.25) K3(-1,6.35) K4(1,6.25) K5(3,6.35) K6(5,6.25) L1(-5,7.75) L2(-3,7.65) L3(-1,7.75) L4(1,7.65) L5(3,7.75) L6(5,7.65)
  silkscreen extent -6.95,-21.95 6.95,11.85, body extent -6.95,-21.95 6.95,11.85, height 15.25
AMPHENOL_10052837-101LF [mm] "96 Contacts, 2mm Pitch, 8 Columns, 4 Pairs per Column, 2 Walls, Right Angle Header"
  round 1.1 hole 0.5: A1(-7,-7.65) A2(-5,-7.75) A3(-3,-7.65) A4(-1,-7.75) A5(1,-7.65) A6(3,-7.75) A7(5,-7.65) A8(7,-7.75) B1(-7,-6.25) B2(-5,-6.35) B3(-3,-6.25) B4(-1,-6.35) B5(1,-6.25) B6(3,-6.35) B7(5,-6.25) B8(7,-6.35) C1(-7,-4.85) C2(-5,-4.95) C3(-3,-4.85) C4(-1,-4.95) C5(1,-4.85) C6(3,-4.95) C7(5,-4.85) C8(7,-4.95) D1(-7,-3.45) D2(-5,-3.55) D3(-3,-3.45) D4(-1,-3.55) D5(1,-3.45) D6(3,-3.55) D7(5,-3.45) D8(7,-3.55) E1(-7,-2.05) E2(-5,-2.15) E3(-3,-2.05) E4(-1,-2.15) E5(1,-2.05) E6(3,-2.15) E7(5,-2.05) E8(7,-2.15) F1(-7,-0.65) F2(-5,-0.75) F3(-3,-0.65) F4(-1,-0.75) F5(1,-0.65) F6(3,-0.75) F7(5,-0.65) F8(7,-0.75) G1(-7,0.75) G2(-5,0.65) G3(-3,0.75) G4(-1,0.65) G5(1,0.75) G6(3,0.65) G7(5,0.75) G8(7,0.65) H1(-7,2.15) H2(-5,2.05) H3(-3,2.15) H4(-1,2.05) H5(1,2.15) H6(3,2.05) H7(5,2.15) H8(7,2.05) I1(-7,3.55) I2(-5,3.45) I3(-3,3.55) I4(-1,3.45) I5(1,3.55) I6(3,3.45) I7(5,3.55) I8(7,3.45) J1(-7,4.95) J2(-5,4.85) J3(-3,4.95) J4(-1,4.85) J5(1,4.95) J6(3,4.85) J7(5,4.95) J8(7,4.85) K1(-7,6.35) K2(-5,6.25) K3(-3,6.35) K4(-1,6.25) K5(1,6.35) K6(3,6.25) K7(5,6.35) K8(7,6.25) L1(-7,7.75) L2(-5,7.65) L3(-3,7.75) L4(-1,7.65) L5(1,7.75) L6(3,7.65) L7(5,7.75) L8(7,7.65)
  silkscreen extent -7.95,-21.95 7.95,11.85, body extent -7.95,-21.95 7.95,11.85, height 15.25
AMPHENOL_10052838-101LF [mm] "96 Contacts, 2mm Pitch, 8 Columns, 4 Pairs per Column, 4 Walls, Right Angle Header"
  round 1.1 hole 0.5: A1(-7,-7.65) A2(-5,-7.75) A3(-3,-7.65) A4(-1,-7.75) A5(1,-7.65) A6(3,-7.75) A7(5,-7.65) A8(7,-7.75) B1(-7,-6.25) B2(-5,-6.35) B3(-3,-6.25) B4(-1,-6.35) B5(1,-6.25) B6(3,-6.35) B7(5,-6.25) B8(7,-6.35) C1(-7,-4.85) C2(-5,-4.95) C3(-3,-4.85) C4(-1,-4.95) C5(1,-4.85) C6(3,-4.95) C7(5,-4.85) C8(7,-4.95) D1(-7,-3.45) D2(-5,-3.55) D3(-3,-3.45) D4(-1,-3.55) D5(1,-3.45) D6(3,-3.55) D7(5,-3.45) D8(7,-3.55) E1(-7,-2.05) E2(-5,-2.15) E3(-3,-2.05) E4(-1,-2.15) E5(1,-2.05) E6(3,-2.15) E7(5,-2.05) E8(7,-2.15) F1(-7,-0.65) F2(-5,-0.75) F3(-3,-0.65) F4(-1,-0.75) F5(1,-0.65) F6(3,-0.75) F7(5,-0.65) F8(7,-0.75) G1(-7,0.75) G2(-5,0.65) G3(-3,0.75) G4(-1,0.65) G5(1,0.75) G6(3,0.65) G7(5,0.75) G8(7,0.65) H1(-7,2.15) H2(-5,2.05) H3(-3,2.15) H4(-1,2.05) H5(1,2.15) H6(3,2.05) H7(5,2.15) H8(7,2.05) I1(-7,3.55) I2(-5,3.45) I3(-3,3.55) I4(-1,3.45) I5(1,3.55) I6(3,3.45) I7(5,3.55) I8(7,3.45) J1(-7,4.95) J2(-5,4.85) J3(-3,4.95) J4(-1,4.85) J5(1,4.95) J6(3,4.85) J7(5,4.95) J8(7,4.85) K1(-7,6.35) K2(-5,6.25) K3(-3,6.35) K4(-1,6.25) K5(1,6.35) K6(3,6.25) K7(5,6.35) K8(7,6.25) L1(-7,7.75) L2(-5,7.65) L3(-3,7.75) L4(-1,7.65) L5(1,7.75) L6(3,7.65) L7(5,7.75) L8(7,7.65)
  silkscreen extent -8.95,-21.95 8.95,11.85, body extent -8.95,-21.95 8.95,11.85, height 15.25
BGA554C80P26X26_2300X2300X176 [mm] "BGA, 0.80mm Pitch, Square; 554Pin, 26 Columns X 26 Rows, 23mm X 23mm X 1.76mm H"
  round 0.35 smd: A2(-9.2,10) A3(-8.4,10) A4(-7.6,10) A5(-6.8,10) A6(-6,10) A8(-4.4,10) A9(-3.6,10) A10(-2.8,10) A11(-2,10) A12(-1.2,10) A13(-0.4,10) A14(0.4,10) A15(1.2,10) A16(2,10) A17(2.8,10) A18(3.6,10) A19(4.4,10) A21(6,10) A22(6.8,10) A23(7.6,10) A24(8.4,10) A25(9.2,10) AA1(-10,-6) AA2(-9.2,-6) AA3(-8.4,-6) AA4(-7.6,-6) AA5(-6.8,-6) AA7(-5.2,-6) AA9(-3.6,-6) AA10(-2.8,-6) AA12(-1.2,-6) AA13(-0.4,-6) AA14(0.4,-6) AA15(1.2,-6) AA17(2.8,-6) AA18(3.6,-6) AA20(5.2,-6) AA22(6.8,-6) AA23(7.6,-6) AA24(8.4,-6) AA25(9.2,-6) AA26(10,-6) AB1(-10,-6.8) AB2(-9.2,-6.8) AB3(-8.4,-6.8) AB4(-7.6,-6.8) AB5(-6.8,-6.8) AB6(-6,-6.8) AB7(-5.2,-6.8) AB9(-3.6,-6.8) AB10(-2.8,-6.8) AB12(-1.2,-6.8) AB13(-0.4,-6.8) AB14(0.4,-6.8) AB15(1.2,-6.8) AB17(2.8,-6.8) AB18(3.6,-6.8) AB20(5.2,-6.8) AB21(6,-6.8) AB22(6.8,-6.8) AB23(7.6,-6.8) AB24(8.4,-6.8) AB25(9.2,-6.8) AB26(10,-6.8) AC1(-10,-7.6) AC2(-9.2,-7.6) AC3(-8.4,-7.6) AC4(-7.6,-7.6) AC5(-6.8,-7.6) AC6(-6,-7.6) AC7(-5.2,-7.6) AC8(-4.4,-7.6) AC9(-3.6,-7.6) AC10(-2.8,-7.6) AC11(-2,-7.6) AC12(-1.2,-7.6) AC13(-0.4,-7.6) AC14(0.4,-7.6) AC15(1.2,-7.6) AC16(2,-7.6) AC17(2.8,-7.6) AC18(3.6,-7.6) AC19(4.4,-7.6) AC20(5.2,-7.6) AC21(6,-7.6) AC22(6.8,-7.6) AC23(7.6,-7.6) AC24(8.4,-7.6) AC25(9.2,-7.6) AC26(10,-7.6) AD1(-10,-8.4) AD2(-9.2,-8.4) AD3(-8.4,-8.4) AD4(-7.6,-8.4) AD5(-6.8,-8.4) AD6(-6,-8.4) AD7(-5.2,-8.4) AD8(-4.4,-8.4) AD9(-3.6,-8.4) AD10(-2.8,-8.4) AD11(-2,-8.4) AD12(-1.2,-8.4) AD13(-0.4,-8.4) AD14(0.4,-8.4) AD15(1.2,-8.4) AD16(2,-8.4) AD17(2.8,-8.4) AD18(3.6,-8.4) AD19(4.4,-8.4) AD20(5.2,-8.4) AD21(6,-8.4) AD22(6.8,-8.4) AD23(7.6,-8.4) AD24(8.4,-8.4) AD25(9.2,-8.4) AD26(10,-8.4) AE1(-10,-9.2) AE2(-9.2,-9.2) AE3(-8.4,-9.2) AE4(-7.6,-9.2) AE5(-6.8,-9.2) AE6(-6,-9.2) AE7(-5.2,-9.2) AE9(-3.6,-9.2) AE10(-2.8,-9.2) AE12(-1.2,-9.2) AE13(-0.4,-9.2) AE15(1.2,-9.2) AE16(2,-9.2) AE18(3.6,-9.2) AE19(4.4,-9.2) AE21(6,-9.2) AE22(6.8,-9.2) AE24(8.4,-9.2) AE25(9.2,-9.2) AE26(10,-9.2) AF2(-9.2,-10) AF3(-8.4,-10) AF4(-7.6,-10) AF5(-6.8,-10) AF6(-6,-10) AF7(-5.2,-10) AF9(-3.6,-10) AF10(-2.8,-10) AF12(-1.2,-10) AF13(-0.4,-10) AF15(1.2,-10) AF16(2,-10) AF18(3.6,-10) AF19(4.4,-10) AF21(6,-10) AF22(6.8,-10) AF24(8.4,-10) AF25(9.2,-10) B1(-10,9.2) B2(-9.2,9.2) B3(-8.4,9.2) B4(-7.6,9.2) B5(-6.8,9.2) B6(-6,9.2) B8(-4.4,9.2) B9(-3.6,9.2) B10(-2.8,9.2) B11(-2,9.2) B12(-1.2,9.2) B13(-0.4,9.2) B14(0.4,9.2) B15(1.2,9.2) B16(2,9.2) B17(2.8,9.2) B18(3.6,9.2) B19(4.4,9.2) B21(6,9.2) B22(6.8,9.2) B23(7.6,9.2) B24(8.4,9.2) B25(9.2,9.2) B26(10,9.2) C1(-10,8.4) C2(-9.2,8.4) C3(-8.4,8.4) C4(-7.6,8.4) C5(-6.8,8.4) C6(-6,8.4) C8(-4.4,8.4) C9(-3.6,8.4) C10(-2.8,8.4) C11(-2,8.4) C12(-1.2,8.4) C13(-0.4,8.4) C14(0.4,8.4) C15(1.2,8.4) C16(2,8.4) C17(2.8,8.4) C18(3.6,8.4) C19(4.4,8.4) C21(6,8.4) C22(6.8,8.4) C23(7.6,8.4) C24(8.4,8.4) C25(9.2,8.4) C26(10,8.4) D1(-10,7.6) D2(-9.2,7.6) D3(-8.4,7.6) D4(-7.6,7.6) D5(-6.8,7.6) D6(-6,7.6) D8(-4.4,7.6) D9(-3.6,7.6) D10(-2.8,7.6) D11(-2,7.6) D12(-1.2,7.6) D13(-0.4,7.6) D14(0.4,7.6) D15(1.2,7.6) D16(2,7.6) D17(2.8,7.6) D18(3.6,7.6) D19(4.4,7.6) D21(6,7.6) D22(6.8,7.6) D23(7.6,7.6) D24(8.4,7.6) D25(9.2,7.6) D26(10,7.6) E1(-10,6.8) E2(-9.2,6.8) E3(-8.4,6.8) E4(-7.6,6.8) E5(-6.8,6.8) E6(-6,6.8) E8(-4.4,6.8) E9(-3.6,6.8) E10(-2.8,6.8) E11(-2,6.8) E12(-1.2,6.8) E13(-0.4,6.8) E14(0.4,6.8) E15(1.2,6.8) E16(2,6.8) E17(2.8,6.8) E18(3.6,6.8) E19(4.4,6.8) E21(6,6.8) E22(6.8,6.8) E23(7.6,6.8) E24(8.4,6.8) E25(9.2,6.8) E26(10,6.8) F1(-10,6) F2(-9.2,6) F3(-8.4,6) F4(-7.6,6) F5(-6.8,6) F8(-4.4,6) F9(-3.6,6) F10(-2.8,6) F12(-1.2,6) F13(-0.4,6) F14(0.4,6) F15(1.2,6) F17(2.8,6) F18(3.6,6) F19(4.4,6) F22(6.8,6) F23(7.6,6) F24(8.4,6) F25(9.2,6) F26(10,6) H1(-10,4.4) H2(-9.2,4.4) H3(-8.4,4.4) H4(-7.6,4.4) H5(-6.8,4.4) H6(-6,4.4) H8(-4.4,4.4) H9(-3.6,4.4) H10(-2.8,4.4) H11(-2,4.4) H12(-1.2,4.4) H13(-0.4,4.4) H14(0.4,4.4) H15(1.2,4.4) H16(2,4.4) H17(2.8,4.4) H18(3.6,4.4) H19(4.4,4.4) H21(6,4.4) H22(6.8,4.4) H23(7.6,4.4) H24(8.4,4.4) H25(9.2,4.4) H26(10,4.4) J1(-10,3.6) J2(-9.2,3.6) J3(-8.4,3.6) J4(-7.6,3.6) J5(-6.8,3.6) J6(-6,3.6) J8(-4.4,3.6) J9(-3.6,3.6) J10(-2.8,3.6) J11(-2,3.6) J12(-1.2,3.6) J13(-0.4,3.6) J14(0.4,3.6) J15(1.2,3.6) J16(2,3.6) J17(2.8,3.6) J18(3.6,3.6) J19(4.4,3.6) J21(6,3.6) J22(6.8,3.6) J23(7.6,3.6) J24(8.4,3.6) J25(9.2,3.6) J26(10,3.6) K1(-10,2.8) K2(-9.2,2.8) K3(-8.4,2.8) K4(-7.6,2.8) K5(-6.8,2.8) K6(-6,2.8) K8(-4.4,2.8) K9(-3.6,2.8) K10(-2.8,2.8) K11(-2,2.8) K12(-1.2,2.8) K13(-0.4,2.8) K14(0.4,2.8) K15(1.2,2.8) K16(2,2.8) K17(2.8,2.8) K18(3.6,2.8) K19(4.4,2.8) K21(6,2.8) K22(6.8,2.8) K23(7.6,2.8) K24(8.4,2.8) K25(9.2,2.8) K26(10,2.8) L1(-10,2) L2(-9.2,2) L3(-8.4,2) L4(-7.6,2) L5(-6.8,2) L8(-4.4,2) L9(-3.6,2) L10(-2.8,2) L11(-2,2) L12(-1.2,2) L13(-0.4,2) L14(0.4,2) L15(1.2,2) L16(2,2) L17(2.8,2) L18(3.6,2) L19(4.4,2) L22(6.8,2) L23(7.6,2) L24(8.4,2) L25(9.2,2) L26(10,2) M1(-10,1.2) M2(-9.2,1.2) M3(-8.4,1.2) M4(-7.6,1.2) M5(-6.8,1.2) M6(-6,1.2) M8(-4.4,1.2) M9(-3.6,1.2) M10(-2.8,1.2) M11(-2,1.2) M12(-1.2,1.2) M13(-0.4,1.2) M14(0.4,1.2) M15(1.2,1.2) M16(2,1.2) M17(2.8,1.2) M18(3.6,1.2) M19(4.4,1.2) M21(6,1.2) M22(6.8,1.2) M23(7.6,1.2) M24(8.4,1.2) M25(9.2,1.2) M26(10,1.2) N1(-10,0.4) N2(-9.2,0.4) N3(-8.4,0.4) N4(-7.6,0.4) N5(-6.8,0.4) N6(-6,0.4) N8(-4.4,0.4) N9(-3.6,0.4) N10(-2.8,0.4) N11(-2,0.4) N12(-1.2,0.4) N13(-0.4,0.4) N14(0.4,0.4) N15(1.2,0.4) N16(2,0.4) N17(2.8,0.4) N18(3.6,0.4) N19(4.4,0.4) N21(6,0.4) N22(6.8,0.4) N23(7.6,0.4) N24(8.4,0.4) N25(9.2,0.4) N26(10,0.4) P1(-10,-0.4) P2(-9.2,-0.4) P3(-8.4,-0.4) P4(-7.6,-0.4) P5(-6.8,-0.4) P6(-6,-0.4) P8(-4.4,-0.4) P9(-3.6,-0.4) P10(-2.8,-0.4) P11(-2,-0.4) P12(-1.2,-0.4) P13(-0.4,-0.4) P14(0.4,-0.4) P15(1.2,-0.4) P16(2,-0.4) P17(2.8,-0.4) P18(3.6,-0.4) P19(4.4,-0.4) P21(6,-0.4) P22(6.8,-0.4) P23(7.6,-0.4) P24(8.4,-0.4) P25(9.2,-0.4) P26(10,-0.4) R1(-10,-1.2) R2(-9.2,-1.2) R3(-8.4,-1.2) R4(-7.6,-1.2) R5(-6.8,-1.2) R6(-6,-1.2) R8(-4.4,-1.2) R9(-3.6,-1.2) R10(-2.8,-1.2) R11(-2,-1.2) R12(-1.2,-1.2) R13(-0.4,-1.2) R14(0.4,-1.2) R15(1.2,-1.2) R16(2,-1.2) R17(2.8,-1.2) R18(3.6,-1.2) R19(4.4,-1.2) R21(6,-1.2) R22(6.8,-1.2) R23(7.6,-1.2) R24(8.4,-1.2) R25(9.2,-1.2) R26(10,-1.2) T1(-10,-2) T2(-9.2,-2) T3(-8.4,-2) T4(-7.6,-2) T5(-6.8,-2) T8(-4.4,-2) T9(-3.6,-2) T10(-2.8,-2) T11(-2,-2) T12(-1.2,-2) T13(-0.4,-2) T14(0.4,-2) T15(1.2,-2) T16(2,-2) T17(2.8,-2) T18(3.6,-2) T19(4.4,-2) T22(6.8,-2) T23(7.6,-2) T24(8.4,-2) T25(9.2,-2) T26(10,-2) U1(-10,-2.8) U2(-9.2,-2.8) U3(-8.4,-2.8) U4(-7.6,-2.8) U5(-6.8,-2.8) U6(-6,-2.8) U8(-4.4,-2.8) U9(-3.6,-2.8) U10(-2.8,-2.8) U11(-2,-2.8) U12(-1.2,-2.8) U13(-0.4,-2.8) U14(0.4,-2.8) U15(1.2,-2.8) U16(2,-2.8) U17(2.8,-2.8) U18(3.6,-2.8) U19(4.4,-2.8) U21(6,-2.8) U22(6.8,-2.8) U23(7.6,-2.8) U24(8.4,-2.8) U25(9.2,-2.8) U26(10,-2.8) V1(-10,-3.6) V2(-9.2,-3.6) V3(-8.4,-3.6) V4(-7.6,-3.6) V5(-6.8,-3.6) V6(-6,-3.6) V8(-4.4,-3.6) V9(-3.6,-3.6) V10(-2.8,-3.6) V11(-2,-3.6) V12(-1.2,-3.6) V13(-0.4,-3.6) V14(0.4,-3.6) V15(1.2,-3.6) V16(2,-3.6) V17(2.8,-3.6) V18(3.6,-3.6) V19(4.4,-3.6) V21(6,-3.6) V22(6.8,-3.6) V23(7.6,-3.6) V24(8.4,-3.6) V25(9.2,-3.6) V26(10,-3.6) W1(-10,-4.4) W2(-9.2,-4.4) W3(-8.4,-4.4) W4(-7.6,-4.4) W5(-6.8,-4.4) W6(-6,-4.4) W8(-4.4,-4.4) W9(-3.6,-4.4) W10(-2.8,-4.4) W11(-2,-4.4) W12(-1.2,-4.4) W13(-0.4,-4.4) W14(0.4,-4.4) W15(1.2,-4.4) W16(2,-4.4) W17(2.8,-4.4) W18(3.6,-4.4) W19(4.4,-4.4) W21(6,-4.4) W22(6.8,-4.4) W23(7.6,-4.4) W24(8.4,-4.4) W25(9.2,-4.4) W26(10,-4.4)
  silkscreen extent -12.22,-11.5 11.5,11.5, body extent -11.5,-11.5 11.5,11.5, height 1.1
C75 [mm] "0.75mm Diameter SMD Pad"
  round 0.75 smd paste-1: 1(0,0)
C100 [mm] "1mm Diameter SMD Pad"
  round 1 smd paste-1: 1(0,0)
c170h100 [mm] "Plated Through Hole: Hole Dia.=1mm Pad Dia.=1.7mm, IPC-7251 Level A"
  round 1.7 hole 1: 1(0,0)
  silkscreen extent -1.2,-1.2 1.2,1.2
CAPC0603X33N [mm] "Chip Capacitor, Body 0.6x0.30mm, IPC Medium Density"
  rect 0.45x0.4 smd: 1(-0.35,0) 2(0.35,0)
  body extent -0.31,-0.16 0.32,0.17, height 0.33
CAPC1005X55N [mm] "Capacitor, Non-Polarized, Chip; 1.00mm L X 0.50mm W X 0.70mm H, IPC Medium Density"
  rect 0.62x0.62 smd: 1(-0.45,0) 2(0.45,0)
  body extent -0.52,-0.27 0.53,0.28, height 0.55
CAPC1608X87N [mm] "Chip Capacitor, Body 1.6x0.8mm IPC Medium Density"
  rect 0.95x1 smd: 1(-0.8,0) 2(0.8,0)
  body extent -0.87,-0.47 0.88,0.48, height 0.87
CAPC1608X90N [mm] "Chip Capacitor, Body 1.6x0.8mm IPC Medium Density"
  rect 0.95x0.95 smd: 1(-0.75,0) 2(0.75,0)
  body extent -0.85,-0.45 0.85,0.45, height 0.9
CAPC2012X95N [mm] "Chip Capacitor, Body 2.0x1.25mm, IPC Medium Density"
  rect 1.1x1.45 smd: 1(-0.9,0) 2(0.9,0)
  silkscreen extent 0,-0.58 0,0.58, body extent -1.05,-0.67 1.05,0.68, height 0.95
CAPC2012X135N [mm] "Chip Capacitor, Body 2.0x1.25mm, IPC Medium Density"
  rect 1.05x1.4 smd: 1(-0.9,0) 2(0.9,0)
  silkscreen extent 0,-0.58 0,0.58, body extent -1.05,-0.67 1.05,0.68, height 1.25
CAPMP3216X180N [mm] "Capacitor, Polarized, Molded  Body 3.2x1.6mm, IPC Medium Density"
  rect 1.8x1.25 smd: 1(-1.3,0) 2(1.3,0)
  silkscreen extent -2.4,-0.7 0,1.25, body extent -1.7,-0.9 1.7,0.9, height 1.6
CAPMP3528X210N [mm] "Capacitor, Polarized, Molded  Body 3.5x2.8mm, IPC Medium Density"
  rect 1.8x2.25 smd: 1(-1.45,0) 2(1.45,0)
  silkscreen extent -2.52,-1.5 1.85,1.72, body extent -1.85,-1.5 1.85,1.5, height 2.1
DIOM5127X229N [mm] "DO-214-AC/SMA Molded Diode, 2-Leads, Body 5.1x2.7mm, IPC Medium Density"
  rect 2.2x1.55 smd: 1(-2.05,0) 2(2.05,0)
  silkscreen extent -3.42,-1.4 2.65,1.45, body extent -2.67,-1.45 2.68,1.45, height 2.29
FIDUCIAL_TOP_C100-200 [mm] "Round Fiducial Target, Top Layer, 1.0mm, Top Solder 2.0mm, Keepout =2.0mm"
  round 1 smd paste-0.51 mask+0.5: FTG2(0,0)
  Top Layer keep-out circle w0.1: c0,0 r1
FIDUCIAL_TOP_S100-200 [mm] "Square Fiducial Target, Top Layer, 1.0mm, Top Solder 2.0mm, Keepout =2.0mm"
  rect 1x1 smd rot 45 paste-0.51 mask+0.5: 1(0,0)
  Top Layer keep-out region: 1.414,0 0,-1.414 -1.414,0 0,1.414
IND_MURATA_DLW21S [mm] "Common Mode Choke Coil, DLW21S Series - Body 2 x 1.2mm"
  rect 0.9x0.4 smd: 1(-0.85,-0.4) 2(0.85,-0.4) 3(0.85,0.4) 4(-0.85,0.4)
  silkscreen extent -1.92,-0.6 0,0.6, body extent -1,-0.6 1,0.6, height 1.4
INDC1005X55N [mm] "Chip Inductor, 2-Leads, EIA 0402, Metric 1005, Body 1x0.5mm, 0402IPC Medium Density"
  rect 0.6x0.62 smd: 1(-0.46,0) 2(0.46,0)
  body extent -0.52,-0.27 0.53,0.28, height 0.55
INDC2012X105N [mm] "Chip Inductor, EIA 0805, Metric 2012, Body 2.0x1.25mm, IPC Medium Density"
  rect 1.15x1.45 smd: 1(-0.9,0) 2(0.9,0)
  silkscreen extent 0,-0.6 0,0.6, body extent -1.1,-0.7 1.1,0.7, height 1.1
jump [mm]
  rect 1.5x1.5 hole 0.965: 1(0,0)
  round 1.5 hole 0.965: 2(0,-2.54)
  silkscreen extent -1.2,-3.81 1.2,1.27, body extent -1.26,-3.84 1.19,1.24, height 8
LED_DIALIGHT_571-0112F [mm] "2x 2mm LED (Top: Red, Bot: Green) PCB Edge Mounting (Without positioning pins) DIALIGHT 571 Serie"
  round 1.7 hole 1: 1(0,0) 2(2.54,0) 3(5.08,0) 4(7.62,0)
  silkscreen extent -6.55,-1.24 8.89,1.24, body extent -6.55,-1.24 8.89,1.24, height 8.61
LED_KINGBRIGHT_KPH-1608CGCK [mm] "SMT Green LED, Case 0603, Body L 1.6 x W 0.8mm H 0.65mm"
  rect 0.8x0.8 smd: 1(-0.825,0) 2(0.825,0)
  silkscreen extent -1.82,-0.4 0.08,0.4, body extent -0.8,-0.4 0.8,0.4, height 0.65
MOLEX_39-28-1043 [mm] "4.20mm (.165\") Pitch Mini-Fit Jr. Header, Dual Row, Vertical, without Snap-in Plastic Peg PCB Lock, 4 Circuits"
  round 2.1 hole 1.4: 1(-2.1,2.75) 2(2.1,2.75) 3(-2.1,-2.75) 4(2.1,-2.75)
  silkscreen extent -5.2,-6 5.2,5, body extent -5.2,-6 5.2,5, height 12.8
Molex_47491-0001_0 [mm]
  rect 1.25x0.4 smd paste+0 mask+0: 1(2.39,1.3) 2(2.39,0.65) 3(2.39,0) 4(2.39,-0.65) 5(2.39,-1.3)
  rect 2x1.5 smd paste+0 mask+0: 6(-1.935,5.15) 10(-1.935,-5.15)
  rect 2.5x1.5 smd paste+0 mask+0: 7(2.065,5.15) 11(2.065,-5.15)
  rect 1.5x2.5 smd paste+0 mask+0: 8(4.265,2.2) 9(4.265,-2.2)
  silkscreen extent 5.48,1.18 5.72,1.42, body extent -4.2,-5.49 4.93,5.51, height 1.44
MOLEX_87832-1420 [mm] "Milli-Grid, Pitch 2mm, 14 contacts, Surface Mount Vertical Header With Locking Window And Centre Polarization Slot"
  rect 1x2.75 smd: 1(-6,-2.125) 2(-6,2.125) 3(-4,-2.125) 4(-4,2.125) 5(-2,-2.125) 6(-2,2.125) 7(0,-2.125) 8(0,2.125) 9(2,-2.125) 10(2,2.125) 11(4,-2.125) 12(4,2.125) 13(6,-2.125) 14(6,2.125)
  round 0.5 hole 1 unplated mask+0.25: 15(-5,0) 16(5,0)
  silkscreen extent -8.32,-4.19 8.32,3.15, body extent -8.32,-3.15 8.33,3.15, height 7.6
MPS_MPM54304GMN [mm] "MPS LGA-33 Case, 0.65mm Pitch, Rect. ; 32 Pin, 7.00mm L X 7.00mm W X 2.10mm H body (w/Thermal Tab 3.55 X 3.55mm)"
  rect 0.925x0.3 smd: 1(-2.963,1.633) 2(-2.963,0.983) 3(-2.963,0.325) 4(-3,-0.313) 5(-2.963,-0.983) 6(-2.963,-1.633) 17(2.963,-1.633) 18(2.963,-0.975) 19(2.963,-0.325) 20(2.963,0.325) 21(2.963,0.983) 22(2.963,1.633)
  rect 0.3x0.925 smd: 7(-2.925,-2.963) 8(-2.275,-2.963) 9(-1.625,-2.963) 10(-0.975,-2.963) 11(-0.325,-2.963) 12(0.325,-2.963) 13(0.975,-2.963) 14(1.625,-2.963) 15(2.275,-2.963) 16(2.925,-2.963) 23(2.925,2.963) 24(2.275,2.963) 25(1.625,2.963) 26(0.975,2.963) 27(0.325,2.963) 28(-0.325,2.963) 29(-0.975,2.963) 30(-1.625,2.963) 31(-2.275,2.963) 32(-2.925,2.963)
  rect 3.55x3.55 smd: 33(0,0)
  silkscreen extent -4.15,-3.5 3.5,3.5, body extent -3.5,-3.5 3.5,3.5, height 2.1
OSC_ECS_ECS-3953M [mm] "SMD Oscillator, 4 pins, 7 x 5mm, 3951/3953M-BN Series"
  rect 2x1.4 smd: 1(-2.1,2.54) 2(-2.1,-2.54) 3(2.1,-2.54) 4(2.1,2.54)
  silkscreen extent -3.83,-3.5 2.5,3.5, body extent -2.5,-3.5 2.5,3.5, height 1.7
QFN24_0R5_4X4 [mm] "SQFN 24 Pins, Pitch 0.5mm, 4mmx4mm"
  rect 0.69x0.28 smd: 1(-1.9,1.25) 2(-1.9,0.75) 3(-1.9,0.25) 4(-1.9,-0.25) 5(-1.9,-0.75) 6(-1.9,-1.25) 13(1.9,-1.25) 14(1.9,-0.75) 15(1.9,-0.25) 16(1.9,0.25) 17(1.9,0.75) 18(1.9,1.25)
  rect 0.28x0.69 smd: 7(-1.25,-1.9) 8(-0.75,-1.9) 9(-0.25,-1.9) 10(0.25,-1.9) 11(0.75,-1.9) 12(1.25,-1.9) 19(1.25,1.9) 20(0.75,1.9) 21(0.25,1.9) 22(-0.25,1.9) 23(-0.75,1.9) 24(-1.25,1.9)
  rect 2.5x2.5 smd: 25(0,0)
  silkscreen extent -2.46,-2.05 2.05,2.05, body extent -2.05,-2.05 2.05,2.05, height 1
QFN50P500X500X100-29N-S325 [mm] "QFN, 0.50mm Pitch, Square; 28 pin, 5.00mm L X 5.00mm W X 1.00mm H body (w/thermal tab 3.25 X 3.25mm),  IPC Medium Density"
  oval 1.05x0.3 smd: 1(-2.35,1.5) 2(-2.35,1) 3(-2.35,0.5) 4(-2.35,0) 5(-2.35,-0.5) 6(-2.35,-1) 7(-2.35,-1.5) 15(2.35,-1.5) 16(2.35,-1) 17(2.35,-0.5) 18(2.35,0) 19(2.35,0.5) 20(2.35,1) 21(2.35,1.5)
  oval 0.3x1.05 smd: 8(-1.5,-2.35) 9(-1,-2.35) 10(-0.5,-2.35) 11(0,-2.35) 12(0.5,-2.35) 13(1,-2.35) 14(1.5,-2.35) 22(1.5,2.35) 23(1,2.35) 24(0.5,2.35) 25(0,2.35) 26(-0.5,2.35) 27(-1,2.35) 28(-1.5,2.35)
  rect 3.25x3.25 smd: 29(0,0)
  silkscreen extent -3.57,-2.5 2.5,2.5, body extent -2.5,-2.5 2.5,2.5, height 1